# EAGLE board RT7258QW-break-panel (EAGLE 6.6.0)
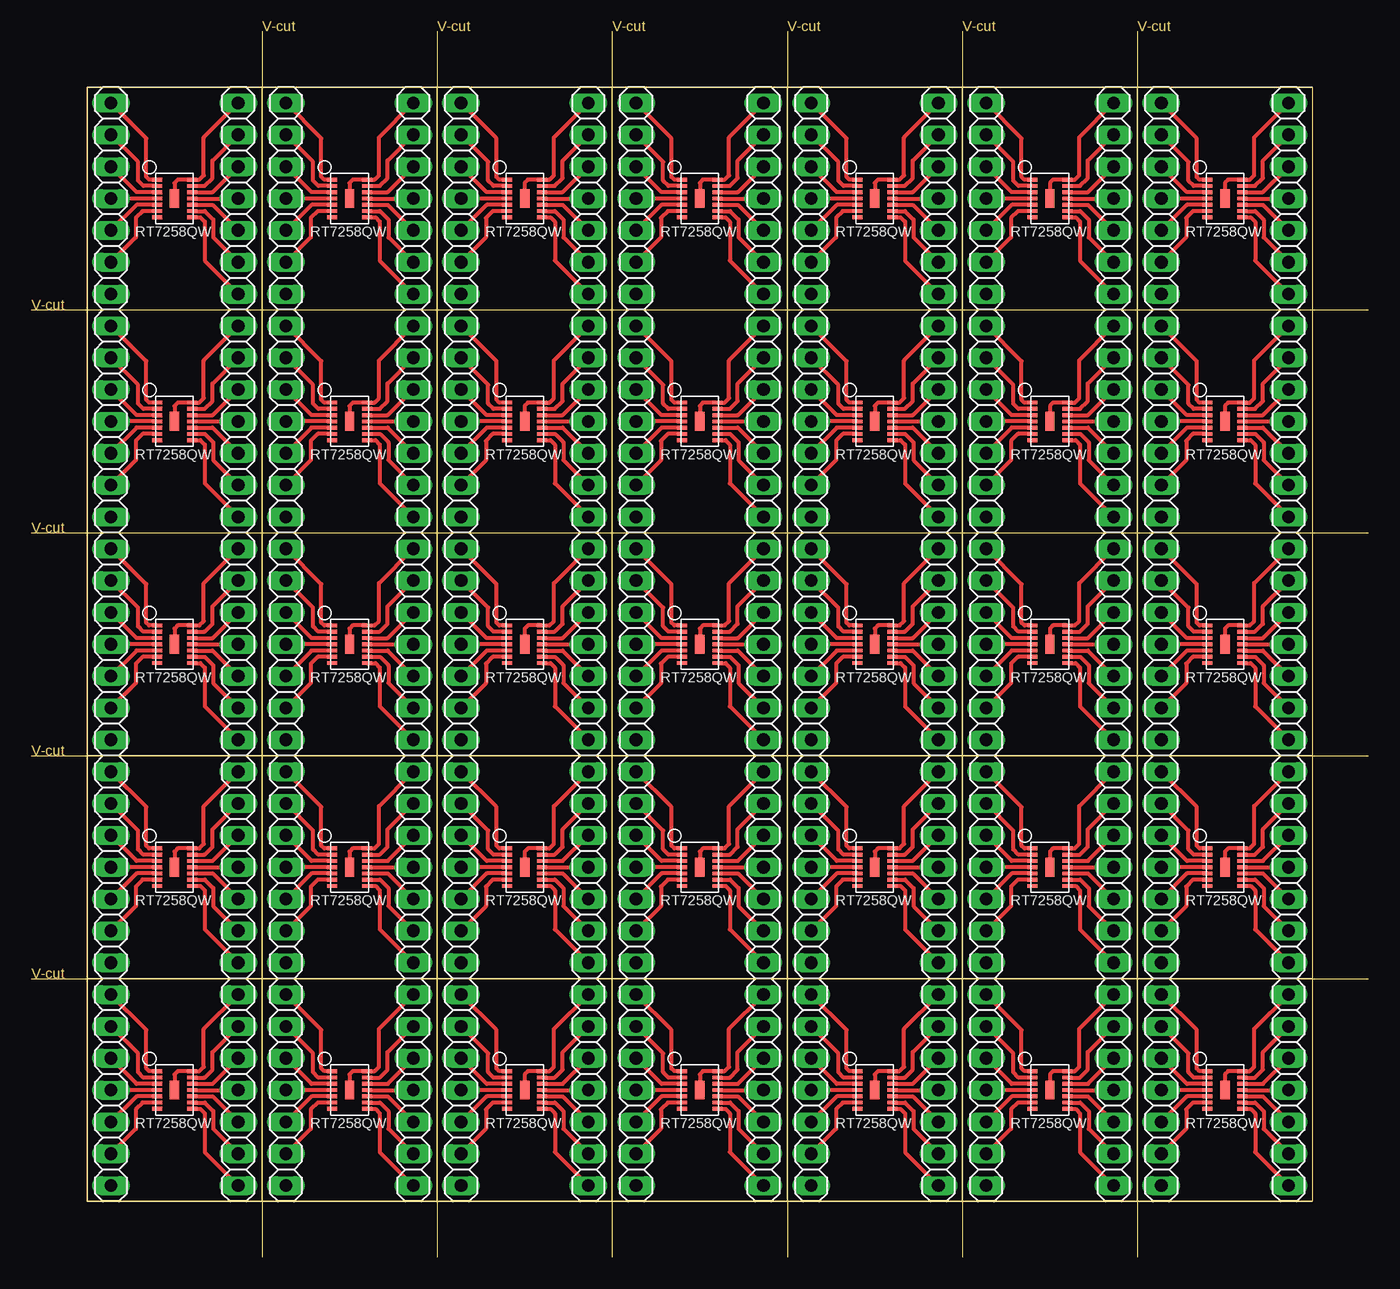
[diagram p0: board, top side]

Size 106.68 x 97.79 mm. Coordinates in mm from the lower left corner, seen from the top.
Outline: 46.36,4.45 46.36,93.34
Outline: 32.39,4.45 32.39,93.34
Outline: 18.42,4.45 18.42,93.34
Outline: 60.33,4.45 60.33,93.34
Outline: 74.3,4.45 74.3,93.34
Outline: 88.27,4.45 88.27,93.34
Outline: 0,75.56 106.68,75.56
Outline: 0,57.79 106.68,57.79
Outline: 0,40.01 106.68,40.01
Outline: 0,22.23 106.68,22.23
Outline: 18.42,97.79 18.42,0
Outline: 32.39,97.79 32.39,0
Outline: 46.36,97.79 46.36,0
Outline: 60.33,97.79 60.33,0
Outline: 74.3,97.79 74.3,0
Outline: 88.27,97.79 88.27,0
Outline: 4.45,93.34 102.24,93.34 102.24,4.45 4.45,4.45 4.45,93.34
Copper layers (1*16): Top 0.035mm / dielectric 1.5mm / Bottom 0.035mm
Design rules "SeeedStudio_2layer_DRU_no_angle_20140221": minimum track width 6mil, minimum drill 12mil, track to track 6mil, track to pad 6mil, pad to pad 6mil, via to via 6mil, smd to smd 0mil, copper to edge 10mil, drill to drill 10mil, minimum pad ring 10mil, minimum via ring 6mil, stop-mask expansion 2mil, vias tented up to drill 100mil, thermal gap 10mil

## Footprints (pad centres in the part's own frame; a part is rotated, then mirrored left to right if it is on the bottom)
1X07 = drill 1.016 long: 1 -7.62,0; 2 -5.08,0; 3 -2.54,0; 4 0,0; 5 2.54,0; 6 5.08,0; 7 7.62,0
RT7258GQW = smd 0.3 x 0.8: P$1 -1.5,-1.4; P$2 -1,-1.4; P$3 -0.5,-1.4; P$4 0,-1.4; P$5 0.5,-1.4; P$6 1,-1.4; P$7 1.5,-1.4; P$8 1.5,1.4; P$9 1,1.4; P$10 0.5,1.4; P$11 0,1.4; P$12 -0.5,1.4; P$13 -1,1.4; P$14 -1.5,1.4 | smd 1.5 x 0.75: P$15 0,0

## Placement (x,y rotation side)
JP1  [1X07]  48.26,48.9 270 top
JP2  [1X07]  58.42,48.9 270 top
JP3  [1X07]  34.29,48.9 270 top
JP4  [1X07]  44.45,48.9 270 top
JP5  [1X07]  20.32,48.9 270 top
JP6  [1X07]  30.48,48.9 270 top
JP7  [1X07]  6.35,48.9 270 top
JP8  [1X07]  16.51,48.9 270 top
JP9  [1X07]  62.23,48.9 270 top
JP10  [1X07]  72.39,48.9 270 top
JP11  [1X07]  76.2,48.9 270 top
JP12  [1X07]  86.36,48.9 270 top
JP13  [1X07]  90.17,48.9 270 top
JP14  [1X07]  100.33,48.9 270 top
JP15  [1X07]  48.26,66.68 270 top
JP16  [1X07]  58.42,66.68 270 top
JP17  [1X07]  34.29,66.68 270 top
JP18  [1X07]  44.45,66.68 270 top
JP19  [1X07]  20.32,66.68 270 top
JP20  [1X07]  30.48,66.68 270 top
JP21  [1X07]  6.35,66.68 270 top
JP22  [1X07]  16.51,66.68 270 top
JP23  [1X07]  62.23,66.68 270 top
JP24  [1X07]  72.39,66.68 270 top
JP25  [1X07]  76.2,66.68 270 top
JP26  [1X07]  86.36,66.68 270 top
JP27  [1X07]  90.17,66.68 270 top
JP28  [1X07]  100.33,66.68 270 top
JP29  [1X07]  48.26,84.46 270 top
JP30  [1X07]  58.42,84.46 270 top
JP31  [1X07]  34.29,84.46 270 top
JP32  [1X07]  44.45,84.46 270 top
JP33  [1X07]  20.32,84.46 270 top
JP34  [1X07]  30.48,84.46 270 top
JP35  [1X07]  6.35,84.46 270 top
JP36  [1X07]  16.51,84.46 270 top
JP37  [1X07]  62.23,84.46 270 top
JP38  [1X07]  72.39,84.46 270 top
JP39  [1X07]  76.2,84.46 270 top
JP40  [1X07]  86.36,84.46 270 top
JP41  [1X07]  90.17,84.46 270 top
JP42  [1X07]  100.33,84.46 270 top
JP43  [1X07]  48.26,31.12 270 top
JP44  [1X07]  58.42,31.12 270 top
JP45  [1X07]  34.29,31.12 270 top
JP46  [1X07]  44.45,31.12 270 top
JP47  [1X07]  20.32,31.12 270 top
JP48  [1X07]  30.48,31.12 270 top
JP49  [1X07]  6.35,31.12 270 top
JP50  [1X07]  16.51,31.12 270 top
JP51  [1X07]  62.23,31.12 270 top
JP52  [1X07]  72.39,31.12 270 top
JP53  [1X07]  76.2,31.12 270 top
JP54  [1X07]  86.36,31.12 270 top
JP55  [1X07]  90.17,31.12 270 top
JP56  [1X07]  100.33,31.12 270 top
JP57  [1X07]  48.26,13.34 270 top
JP58  [1X07]  58.42,13.34 270 top
JP59  [1X07]  34.29,13.34 270 top
JP60  [1X07]  44.45,13.34 270 top
JP61  [1X07]  20.32,13.34 270 top
JP62  [1X07]  30.48,13.34 270 top
JP63  [1X07]  6.35,13.34 270 top
JP64  [1X07]  16.51,13.34 270 top
JP65  [1X07]  62.23,13.34 270 top
JP66  [1X07]  72.39,13.34 270 top
JP67  [1X07]  76.2,13.34 270 top
JP68  [1X07]  86.36,13.34 270 top
JP69  [1X07]  90.17,13.34 270 top
JP70  [1X07]  100.33,13.34 270 top
U$1  RT7258QW  [RT7258GQW]  53.34,48.9 270 top
U$2  RT7258QW  [RT7258GQW]  39.37,48.9 270 top
U$3  RT7258QW  [RT7258GQW]  25.4,48.9 270 top
U$4  RT7258QW  [RT7258GQW]  11.43,48.9 270 top
U$5  RT7258QW  [RT7258GQW]  67.31,48.9 270 top
U$6  RT7258QW  [RT7258GQW]  81.28,48.9 270 top
U$7  RT7258QW  [RT7258GQW]  95.25,48.9 270 top
U$8  RT7258QW  [RT7258GQW]  53.34,66.68 270 top
U$9  RT7258QW  [RT7258GQW]  39.37,66.68 270 top
U$10  RT7258QW  [RT7258GQW]  25.4,66.68 270 top
U$11  RT7258QW  [RT7258GQW]  11.43,66.68 270 top
U$12  RT7258QW  [RT7258GQW]  67.31,66.68 270 top
U$13  RT7258QW  [RT7258GQW]  81.28,66.68 270 top
U$14  RT7258QW  [RT7258GQW]  95.25,66.68 270 top
U$15  RT7258QW  [RT7258GQW]  53.34,84.46 270 top
U$16  RT7258QW  [RT7258GQW]  39.37,84.46 270 top
U$17  RT7258QW  [RT7258GQW]  25.4,84.46 270 top
U$18  RT7258QW  [RT7258GQW]  11.43,84.46 270 top
U$19  RT7258QW  [RT7258GQW]  67.31,84.46 270 top
U$20  RT7258QW  [RT7258GQW]  81.28,84.46 270 top
U$21  RT7258QW  [RT7258GQW]  95.25,84.46 270 top
U$22  RT7258QW  [RT7258GQW]  53.34,31.12 270 top
U$23  RT7258QW  [RT7258GQW]  39.37,31.12 270 top
U$24  RT7258QW  [RT7258GQW]  25.4,31.12 270 top
U$25  RT7258QW  [RT7258GQW]  11.43,31.12 270 top
U$26  RT7258QW  [RT7258GQW]  67.31,31.12 270 top
U$27  RT7258QW  [RT7258GQW]  81.28,31.12 270 top
U$28  RT7258QW  [RT7258GQW]  95.25,31.12 270 top
U$29  RT7258QW  [RT7258GQW]  53.34,13.34 270 top
U$30  RT7258QW  [RT7258GQW]  39.37,13.34 270 top
U$31  RT7258QW  [RT7258GQW]  25.4,13.34 270 top
U$32  RT7258QW  [RT7258GQW]  11.43,13.34 270 top
U$33  RT7258QW  [RT7258GQW]  67.31,13.34 270 top
U$34  RT7258QW  [RT7258GQW]  81.28,13.34 270 top
U$35  RT7258QW  [RT7258GQW]  95.25,13.34 270 top

## Library data of the parts
JP1-JP70 = pinhead
U$1-U$35 = PCR-IC

## Nets
1: JP1.1 U$1.P$1
2: JP1.2 U$1.P$2
3: JP1.3 U$1.P$3
4: JP1.4 U$1.P$4
5: JP1.5 U$1.P$5
6: JP1.6 U$1.P$6
7: JP1.7
8: JP2.7 U$1.P$8
9: JP2.6 U$1.P$9
10: JP2.5 U$1.P$10
11: JP2.4 U$1.P$11
12: JP2.3 U$1.P$12
13: JP2.2 U$1.P$13
14: JP2.1 U$1.P$14 U$1.P$15
15: JP3.7
16: JP3.4 U$2.P$4
17: JP3.5 U$2.P$5
18: JP3.6 U$2.P$6
19: JP4.3 U$2.P$12
20: JP3.2 U$2.P$2
21: JP3.3 U$2.P$3
22: JP4.1 U$2.P$14 U$2.P$15
23: JP3.1 U$2.P$1
24: JP4.2 U$2.P$13
25: JP4.5 U$2.P$10
26: JP4.6 U$2.P$9
27: JP4.7 U$2.P$8
28: JP4.4 U$2.P$11
29: JP5.7
30: JP5.4 U$3.P$4
31: JP5.5 U$3.P$5
32: JP5.6 U$3.P$6
33: JP6.3 U$3.P$12
34: JP5.2 U$3.P$2
35: JP5.3 U$3.P$3
36: JP6.1 U$3.P$14 U$3.P$15
37: JP5.1 U$3.P$1
38: JP6.2 U$3.P$13
39: JP6.5 U$3.P$10
40: JP6.6 U$3.P$9
41: JP6.7 U$3.P$8
42: JP6.4 U$3.P$11
43: JP7.7
44: JP7.4 U$4.P$4
45: JP7.5 U$4.P$5
46: JP7.6 U$4.P$6
47: JP8.3 U$4.P$12
48: JP7.2 U$4.P$2
49: JP7.3 U$4.P$3
50: JP8.1 U$4.P$14 U$4.P$15
51: JP7.1 U$4.P$1
52: JP8.2 U$4.P$13
53: JP8.5 U$4.P$10
54: JP8.6 U$4.P$9
55: JP8.7 U$4.P$8
56: JP8.4 U$4.P$11
57: JP9.7
58: JP9.4 U$5.P$4
59: JP9.5 U$5.P$5
60: JP9.6 U$5.P$6
61: JP10.3 U$5.P$12
62: JP9.2 U$5.P$2
63: JP9.3 U$5.P$3
64: JP10.1 U$5.P$14 U$5.P$15
65: JP9.1 U$5.P$1
66: JP10.2 U$5.P$13
67: JP10.5 U$5.P$10
68: JP10.6 U$5.P$9
69: JP10.7 U$5.P$8
70: JP10.4 U$5.P$11
71: JP11.7
72: JP11.4 U$6.P$4
73: JP11.5 U$6.P$5
74: JP11.6 U$6.P$6
75: JP12.3 U$6.P$12
76: JP11.2 U$6.P$2
77: JP11.3 U$6.P$3
78: JP12.1 U$6.P$14 U$6.P$15
79: JP11.1 U$6.P$1
80: JP12.2 U$6.P$13
81: JP12.5 U$6.P$10
82: JP12.6 U$6.P$9
83: JP12.7 U$6.P$8
84: JP12.4 U$6.P$11
85: JP13.7
86: JP13.4 U$7.P$4
87: JP13.5 U$7.P$5
88: JP13.6 U$7.P$6
89: JP14.3 U$7.P$12
90: JP13.2 U$7.P$2
91: JP13.3 U$7.P$3
92: JP14.1 U$7.P$14 U$7.P$15
93: JP13.1 U$7.P$1
94: JP14.2 U$7.P$13
95: JP14.5 U$7.P$10
96: JP14.6 U$7.P$9
97: JP14.7 U$7.P$8
98: JP14.4 U$7.P$11
99: JP15.7
100: JP15.4 U$8.P$4
101: JP15.5 U$8.P$5
102: JP15.6 U$8.P$6
103: JP16.3 U$8.P$12
104: JP15.2 U$8.P$2
105: JP15.3 U$8.P$3
106: JP16.1 U$8.P$14 U$8.P$15
107: JP15.1 U$8.P$1
108: JP16.2 U$8.P$13
109: JP16.5 U$8.P$10
110: JP16.6 U$8.P$9
111: JP16.7 U$8.P$8
112: JP16.4 U$8.P$11
113: JP17.7
114: JP17.4 U$9.P$4
115: JP17.5 U$9.P$5
116: JP17.6 U$9.P$6
117: JP18.3 U$9.P$12
118: JP17.2 U$9.P$2
119: JP17.3 U$9.P$3
120: JP18.1 U$9.P$14 U$9.P$15
121: JP17.1 U$9.P$1
122: JP18.2 U$9.P$13
123: JP18.5 U$9.P$10
124: JP18.6 U$9.P$9
125: JP18.7 U$9.P$8
126: JP18.4 U$9.P$11
127: JP19.7
128: JP19.4 U$10.P$4
129: JP19.5 U$10.P$5
130: JP19.6 U$10.P$6
131: JP20.3 U$10.P$12
132: JP19.2 U$10.P$2
133: JP19.3 U$10.P$3
134: JP20.1 U$10.P$14 U$10.P$15
135: JP19.1 U$10.P$1
136: JP20.2 U$10.P$13
137: JP20.5 U$10.P$10
138: JP20.6 U$10.P$9
139: JP20.7 U$10.P$8
140: JP20.4 U$10.P$11
141: JP21.7
142: JP21.4 U$11.P$4
143: JP21.5 U$11.P$5
144: JP21.6 U$11.P$6
145: JP22.3 U$11.P$12
146: JP21.2 U$11.P$2
147: JP21.3 U$11.P$3
148: JP22.1 U$11.P$14 U$11.P$15
149: JP21.1 U$11.P$1
150: JP22.2 U$11.P$13
151: JP22.5 U$11.P$10
152: JP22.6 U$11.P$9
153: JP22.7 U$11.P$8
154: JP22.4 U$11.P$11
155: JP23.7
156: JP23.4 U$12.P$4
157: JP23.5 U$12.P$5
158: JP23.6 U$12.P$6
159: JP24.3 U$12.P$12
160: JP23.2 U$12.P$2
161: JP23.3 U$12.P$3
162: JP24.1 U$12.P$14 U$12.P$15
163: JP23.1 U$12.P$1
164: JP24.2 U$12.P$13
165: JP24.5 U$12.P$10
166: JP24.6 U$12.P$9
167: JP24.7 U$12.P$8
168: JP24.4 U$12.P$11
169: JP25.7
170: JP25.4 U$13.P$4
171: JP25.5 U$13.P$5
172: JP25.6 U$13.P$6
173: JP26.3 U$13.P$12
174: JP25.2 U$13.P$2
175: JP25.3 U$13.P$3
176: JP26.1 U$13.P$14 U$13.P$15
177: JP25.1 U$13.P$1
178: JP26.2 U$13.P$13
179: JP26.5 U$13.P$10
180: JP26.6 U$13.P$9
181: JP26.7 U$13.P$8
182: JP26.4 U$13.P$11
183: JP27.7
184: JP27.4 U$14.P$4
185: JP27.5 U$14.P$5
186: JP27.6 U$14.P$6
187: JP28.3 U$14.P$12
188: JP27.2 U$14.P$2
189: JP27.3 U$14.P$3
190: JP28.1 U$14.P$14 U$14.P$15
191: JP27.1 U$14.P$1
192: JP28.2 U$14.P$13
193: JP28.5 U$14.P$10
194: JP28.6 U$14.P$9
195: JP28.7 U$14.P$8
196: JP28.4 U$14.P$11
197: JP29.7
198: JP29.4 U$15.P$4
199: JP29.5 U$15.P$5
200: JP29.6 U$15.P$6
201: JP30.3 U$15.P$12
202: JP29.2 U$15.P$2
203: JP29.3 U$15.P$3
204: JP30.1 U$15.P$14 U$15.P$15
205: JP29.1 U$15.P$1
206: JP30.2 U$15.P$13
207: JP30.5 U$15.P$10
208: JP30.6 U$15.P$9
209: JP30.7 U$15.P$8
210: JP30.4 U$15.P$11
211: JP31.7
212: JP31.4 U$16.P$4
213: JP31.5 U$16.P$5
214: JP31.6 U$16.P$6
215: JP32.3 U$16.P$12
216: JP31.2 U$16.P$2
217: JP31.3 U$16.P$3
218: JP32.1 U$16.P$14 U$16.P$15
219: JP31.1 U$16.P$1
220: JP32.2 U$16.P$13
221: JP32.5 U$16.P$10
222: JP32.6 U$16.P$9
223: JP32.7 U$16.P$8
224: JP32.4 U$16.P$11
225: JP33.7
226: JP33.4 U$17.P$4
227: JP33.5 U$17.P$5
228: JP33.6 U$17.P$6
229: JP34.3 U$17.P$12
230: JP33.2 U$17.P$2
231: JP33.3 U$17.P$3
232: JP34.1 U$17.P$14 U$17.P$15
233: JP33.1 U$17.P$1
234: JP34.2 U$17.P$13
235: JP34.5 U$17.P$10
236: JP34.6 U$17.P$9
237: JP34.7 U$17.P$8
238: JP34.4 U$17.P$11
239: JP35.7
240: JP35.4 U$18.P$4
241: JP35.5 U$18.P$5
242: JP35.6 U$18.P$6
243: JP36.3 U$18.P$12
244: JP35.2 U$18.P$2
245: JP35.3 U$18.P$3
246: JP36.1 U$18.P$14 U$18.P$15
247: JP35.1 U$18.P$1
248: JP36.2 U$18.P$13
249: JP36.5 U$18.P$10
250: JP36.6 U$18.P$9
251: JP36.7 U$18.P$8
252: JP36.4 U$18.P$11
253: JP37.7
254: JP37.4 U$19.P$4
255: JP37.5 U$19.P$5
256: JP37.6 U$19.P$6
257: JP38.3 U$19.P$12
258: JP37.2 U$19.P$2
259: JP37.3 U$19.P$3
260: JP38.1 U$19.P$14 U$19.P$15
261: JP37.1 U$19.P$1
262: JP38.2 U$19.P$13
263: JP38.5 U$19.P$10
264: JP38.6 U$19.P$9
265: JP38.7 U$19.P$8
266: JP38.4 U$19.P$11
267: JP39.7
268: JP39.4 U$20.P$4
269: JP39.5 U$20.P$5
270: JP39.6 U$20.P$6
271: JP40.3 U$20.P$12
272: JP39.2 U$20.P$2
273: JP39.3 U$20.P$3
274: JP40.1 U$20.P$14 U$20.P$15
275: JP39.1 U$20.P$1
276: JP40.2 U$20.P$13
277: JP40.5 U$20.P$10
278: JP40.6 U$20.P$9
279: JP40.7 U$20.P$8
280: JP40.4 U$20.P$11
281: JP41.7
282: JP41.4 U$21.P$4
283: JP41.5 U$21.P$5
284: JP41.6 U$21.P$6
285: JP42.3 U$21.P$12
286: JP41.2 U$21.P$2
287: JP41.3 U$21.P$3
288: JP42.1 U$21.P$14 U$21.P$15
289: JP41.1 U$21.P$1
290: JP42.2 U$21.P$13
291: JP42.5 U$21.P$10
292: JP42.6 U$21.P$9
293: JP42.7 U$21.P$8
294: JP42.4 U$21.P$11
295: JP43.7
296: JP43.4 U$22.P$4
297: JP43.5 U$22.P$5
298: JP43.6 U$22.P$6
299: JP44.3 U$22.P$12
300: JP43.2 U$22.P$2
301: JP43.3 U$22.P$3
302: JP44.1 U$22.P$14 U$22.P$15
303: JP43.1 U$22.P$1
304: JP44.2 U$22.P$13
305: JP44.5 U$22.P$10
306: JP44.6 U$22.P$9
307: JP44.7 U$22.P$8
308: JP44.4 U$22.P$11
309: JP45.7
310: JP45.4 U$23.P$4
311: JP45.5 U$23.P$5
312: JP45.6 U$23.P$6
313: JP46.3 U$23.P$12
314: JP45.2 U$23.P$2
315: JP45.3 U$23.P$3
316: JP46.1 U$23.P$14 U$23.P$15
317: JP45.1 U$23.P$1
318: JP46.2 U$23.P$13
319: JP46.5 U$23.P$10
320: JP46.6 U$23.P$9
321: JP46.7 U$23.P$8
322: JP46.4 U$23.P$11
323: JP47.7
324: JP47.4 U$24.P$4
325: JP47.5 U$24.P$5
326: JP47.6 U$24.P$6
327: JP48.3 U$24.P$12
328: JP47.2 U$24.P$2
329: JP47.3 U$24.P$3
330: JP48.1 U$24.P$14 U$24.P$15
331: JP47.1 U$24.P$1
332: JP48.2 U$24.P$13
333: JP48.5 U$24.P$10
334: JP48.6 U$24.P$9
335: JP48.7 U$24.P$8
336: JP48.4 U$24.P$11
337: JP49.7
338: JP49.4 U$25.P$4
339: JP49.5 U$25.P$5
340: JP49.6 U$25.P$6
341: JP50.3 U$25.P$12
342: JP49.2 U$25.P$2
343: JP49.3 U$25.P$3
344: JP50.1 U$25.P$14 U$25.P$15
345: JP49.1 U$25.P$1
346: JP50.2 U$25.P$13
347: JP50.5 U$25.P$10
348: JP50.6 U$25.P$9
349: JP50.7 U$25.P$8
350: JP50.4 U$25.P$11
351: JP51.7
352: JP51.4 U$26.P$4
353: JP51.5 U$26.P$5
354: JP51.6 U$26.P$6
355: JP52.3 U$26.P$12
356: JP51.2 U$26.P$2
357: JP51.3 U$26.P$3
358: JP52.1 U$26.P$14 U$26.P$15
359: JP51.1 U$26.P$1
360: JP52.2 U$26.P$13
361: JP52.5 U$26.P$10
362: JP52.6 U$26.P$9
363: JP52.7 U$26.P$8
364: JP52.4 U$26.P$11
365: JP53.7
366: JP53.4 U$27.P$4
367: JP53.5 U$27.P$5
368: JP53.6 U$27.P$6
369: JP54.3 U$27.P$12
370: JP53.2 U$27.P$2
371: JP53.3 U$27.P$3
372: JP54.1 U$27.P$14 U$27.P$15
373: JP53.1 U$27.P$1
374: JP54.2 U$27.P$13
375: JP54.5 U$27.P$10
376: JP54.6 U$27.P$9
377: JP54.7 U$27.P$8
378: JP54.4 U$27.P$11
379: JP55.7
380: JP55.4 U$28.P$4
381: JP55.5 U$28.P$5
382: JP55.6 U$28.P$6
383: JP56.3 U$28.P$12
384: JP55.2 U$28.P$2
385: JP55.3 U$28.P$3
386: JP56.1 U$28.P$14 U$28.P$15
387: JP55.1 U$28.P$1
388: JP56.2 U$28.P$13
389: JP56.5 U$28.P$10
390: JP56.6 U$28.P$9
391: JP56.7 U$28.P$8
392: JP56.4 U$28.P$11
393: JP57.7
394: JP57.4 U$29.P$4
395: JP57.5 U$29.P$5
396: JP57.6 U$29.P$6
397: JP58.3 U$29.P$12
398: JP57.2 U$29.P$2
399: JP57.3 U$29.P$3
400: JP58.1 U$29.P$14 U$29.P$15
401: JP57.1 U$29.P$1
402: JP58.2 U$29.P$13
403: JP58.5 U$29.P$10
404: JP58.6 U$29.P$9
405: JP58.7 U$29.P$8
406: JP58.4 U$29.P$11
407: JP59.7
408: JP59.4 U$30.P$4
409: JP59.5 U$30.P$5
410: JP59.6 U$30.P$6
411: JP60.3 U$30.P$12
412: JP59.2 U$30.P$2
413: JP59.3 U$30.P$3
414: JP60.1 U$30.P$14 U$30.P$15
415: JP59.1 U$30.P$1
416: JP60.2 U$30.P$13
417: JP60.5 U$30.P$10
418: JP60.6 U$30.P$9
419: JP60.7 U$30.P$8
420: JP60.4 U$30.P$11
421: JP61.7
422: JP61.4 U$31.P$4
423: JP61.5 U$31.P$5
424: JP61.6 U$31.P$6
425: JP62.3 U$31.P$12
426: JP61.2 U$31.P$2
427: JP61.3 U$31.P$3
428: JP62.1 U$31.P$14 U$31.P$15
429: JP61.1 U$31.P$1
430: JP62.2 U$31.P$13
431: JP62.5 U$31.P$10
432: JP62.6 U$31.P$9
433: JP62.7 U$31.P$8
434: JP62.4 U$31.P$11
435: JP63.7
436: JP63.4 U$32.P$4
437: JP63.5 U$32.P$5
438: JP63.6 U$32.P$6
439: JP64.3 U$32.P$12
440: JP63.2 U$32.P$2
441: JP63.3 U$32.P$3
442: JP64.1 U$32.P$14 U$32.P$15
443: JP63.1 U$32.P$1
444: JP64.2 U$32.P$13
445: JP64.5 U$32.P$10
446: JP64.6 U$32.P$9
447: JP64.7 U$32.P$8
448: JP64.4 U$32.P$11
449: JP65.7
450: JP65.4 U$33.P$4
451: JP65.5 U$33.P$5
452: JP65.6 U$33.P$6
453: JP66.3 U$33.P$12
454: JP65.2 U$33.P$2
455: JP65.3 U$33.P$3
456: JP66.1 U$33.P$14 U$33.P$15
457: JP65.1 U$33.P$1
458: JP66.2 U$33.P$13
459: JP66.5 U$33.P$10
460: JP66.6 U$33.P$9
461: JP66.7 U$33.P$8
462: JP66.4 U$33.P$11
463: JP67.7
464: JP67.4 U$34.P$4
465: JP67.5 U$34.P$5
466: JP67.6 U$34.P$6
467: JP68.3 U$34.P$12
468: JP67.2 U$34.P$2
469: JP67.3 U$34.P$3
470: JP68.1 U$34.P$14 U$34.P$15
471: JP67.1 U$34.P$1
472: JP68.2 U$34.P$13
473: JP68.5 U$34.P$10
474: JP68.6 U$34.P$9
475: JP68.7 U$34.P$8
476: JP68.4 U$34.P$11
477: JP69.7
478: JP69.4 U$35.P$4
479: JP69.5 U$35.P$5
480: JP69.6 U$35.P$6
481: JP70.3 U$35.P$12
482: JP69.2 U$35.P$2
483: JP69.3 U$35.P$3
484: JP70.1 U$35.P$14 U$35.P$15
485: JP69.1 U$35.P$1
486: JP70.2 U$35.P$13
487: JP70.5 U$35.P$10
488: JP70.6 U$35.P$9
489: JP70.7 U$35.P$8
490: JP70.4 U$35.P$11

## Tracks (layer width: path | path; a pad name or v marks a point on that pad's centre or on a via)
1
  Top 0.305: U$1.P$1 51.31,50.4 51.08,50.62 51.08,53.7 JP1.1
2
  Top 0.305: U$1.P$2 50.84,49.9 50.42,50.32 50.42,51.82 JP1.2
3
  Top 0.305: U$1.P$3 50.3,49.4 JP1.3
4
  Top 0.305: U$1.P$4 JP1.4
5
  Top 0.305: U$1.P$5 50.3,48.4 JP1.5
6
  Top 0.305: U$1.P$6 50.79,47.9 50.24,47.35 50.24,45.8 JP1.6
8
  Top 0.305: U$1.P$8 55.4,47.4 55.75,47.04 55.75,43.94 JP2.7
9
  Top 0.305: U$1.P$9 55.76,47.9 56.44,47.22 56.44,45.8 JP2.6
10
  Top 0.305: U$1.P$10 56.38,48.4 JP2.5
11
  Top 0.305: U$1.P$11 JP2.4
12
  Top 0.305: U$1.P$12 56.38,49.4 JP2.3
13
  Top 0.305: U$1.P$13 55.74,49.9 56.36,50.52 56.36,51.92 JP2.2
14
  Top 0.305: JP2.1 55.68,53.77 55.68,50.75 55.32,50.4 U$1.P$14 53.6,50.4 53.34,50.14 U$1.P$15
16
  Top 0.305: U$2.P$4 JP3.4
17
  Top 0.305: U$2.P$5 36.33,48.4 JP3.5
18
  Top 0.305: U$2.P$6 36.82,47.9 36.27,47.35 36.27,45.8 JP3.6
19
  Top 0.305: U$2.P$12 42.41,49.4 JP4.3
20
  Top 0.305: U$2.P$2 36.87,49.9 36.45,50.32 36.45,51.82 JP3.2
21
  Top 0.305: U$2.P$3 36.33,49.4 JP3.3
22
  Top 0.305: JP4.1 41.71,53.77 41.71,50.75 41.35,50.4 U$2.P$14 39.62,50.4 39.37,50.14 U$2.P$15
23
  Top 0.305: U$2.P$1 37.34,50.4 37.11,50.62 37.11,53.7 JP3.1
24
  Top 0.305: U$2.P$13 41.77,49.9 42.39,50.52 42.39,51.92 JP4.2
25
  Top 0.305: U$2.P$10 42.41,48.4 JP4.5
26
  Top 0.305: U$2.P$9 41.79,47.9 42.47,47.22 42.47,45.8 JP4.6
27
  Top 0.305: U$2.P$8 41.43,47.4 41.78,47.04 41.78,43.94 JP4.7
28
  Top 0.305: U$2.P$11 JP4.4
30
  Top 0.305: U$3.P$4 JP5.4
31
  Top 0.305: U$3.P$5 22.36,48.4 JP5.5
32
  Top 0.305: U$3.P$6 22.85,47.9 22.3,47.35 22.3,45.8 JP5.6
33
  Top 0.305: U$3.P$12 28.44,49.4 JP6.3
34
  Top 0.305: U$3.P$2 22.9,49.9 22.48,50.32 22.48,51.82 JP5.2
35
  Top 0.305: U$3.P$3 22.36,49.4 JP5.3
36
  Top 0.305: JP6.1 27.74,53.77 27.74,50.75 27.38,50.4 U$3.P$14 25.66,50.4 25.4,50.14 U$3.P$15
37
  Top 0.305: U$3.P$1 23.37,50.4 23.14,50.62 23.14,53.7 JP5.1
38
  Top 0.305: U$3.P$13 27.8,49.9 28.42,50.52 28.42,51.92 JP6.2
39
  Top 0.305: U$3.P$10 28.44,48.4 JP6.5
40
  Top 0.305: U$3.P$9 27.82,47.9 28.5,47.22 28.5,45.8 JP6.6
41
  Top 0.305: U$3.P$8 27.46,47.4 27.81,47.04 27.81,43.94 JP6.7
42
  Top 0.305: U$3.P$11 JP6.4
44
  Top 0.305: U$4.P$4 JP7.4
45
  Top 0.305: U$4.P$5 8.39,48.4 JP7.5
46
  Top 0.305: U$4.P$6 8.88,47.9 8.33,47.35 8.33,45.8 JP7.6
47
  Top 0.305: U$4.P$12 14.47,49.4 JP8.3
48
  Top 0.305: U$4.P$2 8.93,49.9 8.51,50.32 8.51,51.82 JP7.2
49
  Top 0.305: U$4.P$3 8.39,49.4 JP7.3
50
  Top 0.305: JP8.1 13.77,53.77 13.77,50.75 13.41,50.4 U$4.P$14 11.69,50.4 11.43,50.14 U$4.P$15
51
  Top 0.305: U$4.P$1 9.4,50.4 9.17,50.62 9.17,53.7 JP7.1
52
  Top 0.305: U$4.P$13 13.83,49.9 14.45,50.52 14.45,51.92 JP8.2
53
  Top 0.305: U$4.P$10 14.47,48.4 JP8.5
54
  Top 0.305: U$4.P$9 13.85,47.9 14.53,47.22 14.53,45.8 JP8.6
55
  Top 0.305: U$4.P$8 13.49,47.4 13.84,47.04 13.84,43.94 JP8.7
56
  Top 0.305: U$4.P$11 JP8.4
58
  Top 0.305: U$5.P$4 JP9.4
59
  Top 0.305: U$5.P$5 64.27,48.4 JP9.5
60
  Top 0.305: U$5.P$6 64.76,47.9 64.21,47.35 64.21,45.8 JP9.6
61
  Top 0.305: U$5.P$12 70.35,49.4 JP10.3
62
  Top 0.305: U$5.P$2 64.81,49.9 64.39,50.32 64.39,51.82 JP9.2
63
  Top 0.305: U$5.P$3 64.27,49.4 JP9.3
64
  Top 0.305: JP10.1 69.65,53.77 69.65,50.75 69.29,50.4 U$5.P$14 67.56,50.4 67.31,50.14 U$5.P$15
65
  Top 0.305: U$5.P$1 65.28,50.4 65.05,50.62 65.05,53.7 JP9.1
66
  Top 0.305: U$5.P$13 69.71,49.9 70.33,50.52 70.33,51.92 JP10.2
67
  Top 0.305: U$5.P$10 70.35,48.4 JP10.5
68
  Top 0.305: U$5.P$9 69.73,47.9 70.41,47.22 70.41,45.8 JP10.6
69
  Top 0.305: U$5.P$8 69.37,47.4 69.72,47.04 69.72,43.94 JP10.7
70
  Top 0.305: U$5.P$11 JP10.4
72
  Top 0.305: U$6.P$4 JP11.4
73
  Top 0.305: U$6.P$5 78.24,48.4 JP11.5
74
  Top 0.305: U$6.P$6 78.73,47.9 78.18,47.35 78.18,45.8 JP11.6
75
  Top 0.305: U$6.P$12 84.32,49.4 JP12.3
76
  Top 0.305: U$6.P$2 78.78,49.9 78.36,50.32 78.36,51.82 JP11.2
77
  Top 0.305: U$6.P$3 78.24,49.4 JP11.3
78
  Top 0.305: JP12.1 83.62,53.77 83.62,50.75 83.26,50.4 U$6.P$14 81.53,50.4 81.28,50.14 U$6.P$15
79
  Top 0.305: U$6.P$1 79.25,50.4 79.02,50.62 79.02,53.7 JP11.1
80
  Top 0.305: U$6.P$13 83.68,49.9 84.3,50.52 84.3,51.92 JP12.2
81
  Top 0.305: U$6.P$10 84.32,48.4 JP12.5
82
  Top 0.305: U$6.P$9 83.7,47.9 84.38,47.22 84.38,45.8 JP12.6
83
  Top 0.305: U$6.P$8 83.34,47.4 83.69,47.04 83.69,43.94 JP12.7
84
  Top 0.305: U$6.P$11 JP12.4
86
  Top 0.305: U$7.P$4 JP13.4
87
  Top 0.305: U$7.P$5 92.21,48.4 JP13.5
88
  Top 0.305: U$7.P$6 92.7,47.9 92.15,47.35 92.15,45.8 JP13.6
89
  Top 0.305: U$7.P$12 98.29,49.4 JP14.3
90
  Top 0.305: U$7.P$2 92.75,49.9 92.33,50.32 92.33,51.82 JP13.2
91
  Top 0.305: U$7.P$3 92.21,49.4 JP13.3
92
  Top 0.305: JP14.1 97.59,53.77 97.59,50.75 97.23,50.4 U$7.P$14 95.5,50.4 95.25,50.14 U$7.P$15
93
  Top 0.305: U$7.P$1 93.22,50.4 92.99,50.62 92.99,53.7 JP13.1
94
  Top 0.305: U$7.P$13 97.65,49.9 98.27,50.52 98.27,51.92 JP14.2
95
  Top 0.305: U$7.P$10 98.29,48.4 JP14.5
96
  Top 0.305: U$7.P$9 97.67,47.9 98.35,47.22 98.35,45.8 JP14.6
97
  Top 0.305: U$7.P$8 97.31,47.4 97.66,47.04 97.66,43.94 JP14.7
98
  Top 0.305: U$7.P$11 JP14.4
100
  Top 0.305: U$8.P$4 JP15.4
101
  Top 0.305: U$8.P$5 50.3,66.18 JP15.5
102
  Top 0.305: U$8.P$6 50.79,65.68 50.24,65.13 50.24,63.58 JP15.6
103
  Top 0.305: U$8.P$12 56.38,67.18 JP16.3
104
  Top 0.305: U$8.P$2 50.84,67.68 50.42,68.1 50.42,69.6 JP15.2
105
  Top 0.305: U$8.P$3 50.3,67.18 JP15.3
106
  Top 0.305: JP16.1 55.68,71.55 55.68,68.53 55.32,68.18 U$8.P$14 53.6,68.18 53.34,67.92 U$8.P$15
107
  Top 0.305: U$8.P$1 51.31,68.18 51.08,68.4 51.08,71.48 JP15.1
108
  Top 0.305: U$8.P$13 55.74,67.68 56.36,68.3 56.36,69.7 JP16.2
109
  Top 0.305: U$8.P$10 56.38,66.18 JP16.5
110
  Top 0.305: U$8.P$9 55.76,65.68 56.44,65 56.44,63.58 JP16.6
111
  Top 0.305: U$8.P$8 55.4,65.18 55.75,64.82 55.75,61.72 JP16.7
112
  Top 0.305: U$8.P$11 JP16.4
114
  Top 0.305: U$9.P$4 JP17.4
115
  Top 0.305: U$9.P$5 36.33,66.18 JP17.5
116
  Top 0.305: U$9.P$6 36.82,65.68 36.27,65.13 36.27,63.58 JP17.6
117
  Top 0.305: U$9.P$12 42.41,67.18 JP18.3
118
  Top 0.305: U$9.P$2 36.87,67.68 36.45,68.1 36.45,69.6 JP17.2
119
  Top 0.305: U$9.P$3 36.33,67.18 JP17.3
120
  Top 0.305: JP18.1 41.71,71.55 41.71,68.53 41.35,68.18 U$9.P$14 39.62,68.18 39.37,67.92 U$9.P$15
121
  Top 0.305: U$9.P$1 37.34,68.18 37.11,68.4 37.11,71.48 JP17.1
122
  Top 0.305: U$9.P$13 41.77,67.68 42.39,68.3 42.39,69.7 JP18.2
123
  Top 0.305: U$9.P$10 42.41,66.18 JP18.5
124
  Top 0.305: U$9.P$9 41.79,65.68 42.47,65 42.47,63.58 JP18.6
125
  Top 0.305: U$9.P$8 41.43,65.18 41.78,64.82 41.78,61.72 JP18.7
126
  Top 0.305: U$9.P$11 JP18.4
128
  Top 0.305: U$10.P$4 JP19.4
129
  Top 0.305: U$10.P$5 22.36,66.18 JP19.5
130
  Top 0.305: U$10.P$6 22.85,65.68 22.3,65.13 22.3,63.58 JP19.6
131
  Top 0.305: U$10.P$12 28.44,67.18 JP20.3
132
  Top 0.305: U$10.P$2 22.9,67.68 22.48,68.1 22.48,69.6 JP19.2
133
  Top 0.305: U$10.P$3 22.36,67.18 JP19.3
134
  Top 0.305: JP20.1 27.74,71.55 27.74,68.53 27.38,68.18 U$10.P$14 25.66,68.18 25.4,67.92 U$10.P$15
135
  Top 0.305: U$10.P$1 23.37,68.18 23.14,68.4 23.14,71.48 JP19.1
136
  Top 0.305: U$10.P$13 27.8,67.68 28.42,68.3 28.42,69.7 JP20.2
137
  Top 0.305: U$10.P$10 28.44,66.18 JP20.5
138
  Top 0.305: U$10.P$9 27.82,65.68 28.5,65 28.5,63.58 JP20.6
139
  Top 0.305: U$10.P$8 27.46,65.18 27.81,64.82 27.81,61.72 JP20.7
140
  Top 0.305: U$10.P$11 JP20.4
142
  Top 0.305: U$11.P$4 JP21.4
143
  Top 0.305: U$11.P$5 8.39,66.18 JP21.5
144
  Top 0.305: U$11.P$6 8.88,65.68 8.33,65.13 8.33,63.58 JP21.6
145
  Top 0.305: U$11.P$12 14.47,67.18 JP22.3
146
  Top 0.305: U$11.P$2 8.93,67.68 8.51,68.1 8.51,69.6 JP21.2
147
  Top 0.305: U$11.P$3 8.39,67.18 JP21.3
148
  Top 0.305: JP22.1 13.77,71.55 13.77,68.53 13.41,68.18 U$11.P$14 11.69,68.18 11.43,67.92 U$11.P$15
149
  Top 0.305: U$11.P$1 9.4,68.18 9.17,68.4 9.17,71.48 JP21.1
150
  Top 0.305: U$11.P$13 13.83,67.68 14.45,68.3 14.45,69.7 JP22.2
151
  Top 0.305: U$11.P$10 14.47,66.18 JP22.5
152
  Top 0.305: U$11.P$9 13.85,65.68 14.53,65 14.53,63.58 JP22.6
153
  Top 0.305: U$11.P$8 13.49,65.18 13.84,64.82 13.84,61.72 JP22.7
154
  Top 0.305: U$11.P$11 JP22.4
156
  Top 0.305: U$12.P$4 JP23.4
157
  Top 0.305: U$12.P$5 64.27,66.18 JP23.5
158
  Top 0.305: U$12.P$6 64.76,65.68 64.21,65.13 64.21,63.58 JP23.6
159
  Top 0.305: U$12.P$12 70.35,67.18 JP24.3
160
  Top 0.305: U$12.P$2 64.81,67.68 64.39,68.1 64.39,69.6 JP23.2
161
  Top 0.305: U$12.P$3 64.27,67.18 JP23.3
162
  Top 0.305: JP24.1 69.65,71.55 69.65,68.53 69.29,68.18 U$12.P$14 67.56,68.18 67.31,67.92 U$12.P$15
163
  Top 0.305: U$12.P$1 65.28,68.18 65.05,68.4 65.05,71.48 JP23.1
164
  Top 0.305: U$12.P$13 69.71,67.68 70.33,68.3 70.33,69.7 JP24.2
165
  Top 0.305: U$12.P$10 70.35,66.18 JP24.5
166
  Top 0.305: U$12.P$9 69.73,65.68 70.41,65 70.41,63.58 JP24.6
167
  Top 0.305: U$12.P$8 69.37,65.18 69.72,64.82 69.72,61.72 JP24.7
168
  Top 0.305: U$12.P$11 JP24.4
170
  Top 0.305: U$13.P$4 JP25.4
171
  Top 0.305: U$13.P$5 78.24,66.18 JP25.5
172
  Top 0.305: U$13.P$6 78.73,65.68 78.18,65.13 78.18,63.58 JP25.6
173
  Top 0.305: U$13.P$12 84.32,67.18 JP26.3
174
  Top 0.305: U$13.P$2 78.78,67.68 78.36,68.1 78.36,69.6 JP25.2
175
  Top 0.305: U$13.P$3 78.24,67.18 JP25.3
176
  Top 0.305: JP26.1 83.62,71.55 83.62,68.53 83.26,68.18 U$13.P$14 81.53,68.18 81.28,67.92 U$13.P$15
177
  Top 0.305: U$13.P$1 79.25,68.18 79.02,68.4 79.02,71.48 JP25.1
178
  Top 0.305: U$13.P$13 83.68,67.68 84.3,68.3 84.3,69.7 JP26.2
179
  Top 0.305: U$13.P$10 84.32,66.18 JP26.5
180
  Top 0.305: U$13.P$9 83.7,65.68 84.38,65 84.38,63.58 JP26.6
181
  Top 0.305: U$13.P$8 83.34,65.18 83.69,64.82 83.69,61.72 JP26.7
182
  Top 0.305: U$13.P$11 JP26.4
184
  Top 0.305: U$14.P$4 JP27.4
185
  Top 0.305: U$14.P$5 92.21,66.18 JP27.5
186
  Top 0.305: U$14.P$6 92.7,65.68 92.15,65.13 92.15,63.58 JP27.6
187
  Top 0.305: U$14.P$12 98.29,67.18 JP28.3
188
  Top 0.305: U$14.P$2 92.75,67.68 92.33,68.1 92.33,69.6 JP27.2
189
  Top 0.305: U$14.P$3 92.21,67.18 JP27.3
190
  Top 0.305: JP28.1 97.59,71.55 97.59,68.53 97.23,68.18 U$14.P$14 95.5,68.18 95.25,67.92 U$14.P$15
191
  Top 0.305: U$14.P$1 93.22,68.18 92.99,68.4 92.99,71.48 JP27.1
192
  Top 0.305: U$14.P$13 97.65,67.68 98.27,68.3 98.27,69.7 JP28.2
193
  Top 0.305: U$14.P$10 98.29,66.18 JP28.5
194
  Top 0.305: U$14.P$9 97.67,65.68 98.35,65 98.35,63.58 JP28.6
195
  Top 0.305: U$14.P$8 97.31,65.18 97.66,64.82 97.66,61.72 JP28.7
196
  Top 0.305: U$14.P$11 JP28.4
198
  Top 0.305: U$15.P$4 JP29.4
199
  Top 0.305: U$15.P$5 50.3,83.96 JP29.5
200
  Top 0.305: U$15.P$6 50.79,83.46 50.24,82.91 50.24,81.36 JP29.6
201
  Top 0.305: U$15.P$12 56.38,84.96 JP30.3
202
  Top 0.305: U$15.P$2 50.84,85.46 50.42,85.88 50.42,87.38 JP29.2
203
  Top 0.305: U$15.P$3 50.3,84.96 JP29.3
204
  Top 0.305: JP30.1 55.68,89.33 55.68,86.31 55.32,85.96 U$15.P$14 53.6,85.96 53.34,85.7 U$15.P$15
205
  Top 0.305: U$15.P$1 51.31,85.96 51.08,86.18 51.08,89.26 JP29.1
206
  Top 0.305: U$15.P$13 55.74,85.46 56.36,86.08 56.36,87.48 JP30.2
207
  Top 0.305: U$15.P$10 56.38,83.96 JP30.5
208
  Top 0.305: U$15.P$9 55.76,83.46 56.44,82.78 56.44,81.36 JP30.6
209
  Top 0.305: U$15.P$8 55.4,82.96 55.75,82.6 55.75,79.5 JP30.7
210
  Top 0.305: U$15.P$11 JP30.4
212
  Top 0.305: U$16.P$4 JP31.4
213
  Top 0.305: U$16.P$5 36.33,83.96 JP31.5
214
  Top 0.305: U$16.P$6 36.82,83.46 36.27,82.91 36.27,81.36 JP31.6
215
  Top 0.305: U$16.P$12 42.41,84.96 JP32.3
216
  Top 0.305: U$16.P$2 36.87,85.46 36.45,85.88 36.45,87.38 JP31.2
217
  Top 0.305: U$16.P$3 36.33,84.96 JP31.3
218
  Top 0.305: JP32.1 41.71,89.33 41.71,86.31 41.35,85.96 U$16.P$14 39.62,85.96 39.37,85.7 U$16.P$15
219
  Top 0.305: U$16.P$1 37.34,85.96 37.11,86.18 37.11,89.26 JP31.1
220
  Top 0.305: U$16.P$13 41.77,85.46 42.39,86.08 42.39,87.48 JP32.2
221
  Top 0.305: U$16.P$10 42.41,83.96 JP32.5
222
  Top 0.305: U$16.P$9 41.79,83.46 42.47,82.78 42.47,81.36 JP32.6
223
  Top 0.305: U$16.P$8 41.43,82.96 41.78,82.6 41.78,79.5 JP32.7
224
  Top 0.305: U$16.P$11 JP32.4
226
  Top 0.305: U$17.P$4 JP33.4
227
  Top 0.305: U$17.P$5 22.36,83.96 JP33.5
228
  Top 0.305: U$17.P$6 22.85,83.46 22.3,82.91 22.3,81.36 JP33.6
229
  Top 0.305: U$17.P$12 28.44,84.96 JP34.3
230
  Top 0.305: U$17.P$2 22.9,85.46 22.48,85.88 22.48,87.38 JP33.2
231
  Top 0.305: U$17.P$3 22.36,84.96 JP33.3
232
  Top 0.305: JP34.1 27.74,89.33 27.74,86.31 27.38,85.96 U$17.P$14 25.66,85.96 25.4,85.7 U$17.P$15
233
  Top 0.305: U$17.P$1 23.37,85.96 23.14,86.18 23.14,89.26 JP33.1
234
  Top 0.305: U$17.P$13 27.8,85.46 28.42,86.08 28.42,87.48 JP34.2
235
  Top 0.305: U$17.P$10 28.44,83.96 JP34.5
236
  Top 0.305: U$17.P$9 27.82,83.46 28.5,82.78 28.5,81.36 JP34.6
237
  Top 0.305: U$17.P$8 27.46,82.96 27.81,82.6 27.81,79.5 JP34.7
238
  Top 0.305: U$17.P$11 JP34.4
240
  Top 0.305: U$18.P$4 JP35.4
241
  Top 0.305: U$18.P$5 8.39,83.96 JP35.5
242
  Top 0.305: U$18.P$6 8.88,83.46 8.33,82.91 8.33,81.36 JP35.6
243
  Top 0.305: U$18.P$12 14.47,84.96 JP36.3
244
  Top 0.305: U$18.P$2 8.93,85.46 8.51,85.88 8.51,87.38 JP35.2
245
  Top 0.305: U$18.P$3 8.39,84.96 JP35.3
246
  Top 0.305: JP36.1 13.77,89.33 13.77,86.31 13.41,85.96 U$18.P$14 11.69,85.96 11.43,85.7 U$18.P$15
247
  Top 0.305: U$18.P$1 9.4,85.96 9.17,86.18 9.17,89.26 JP35.1
248
  Top 0.305: U$18.P$13 13.83,85.46 14.45,86.08 14.45,87.48 JP36.2
249
  Top 0.305: U$18.P$10 14.47,83.96 JP36.5
250
  Top 0.305: U$18.P$9 13.85,83.46 14.53,82.78 14.53,81.36 JP36.6
251
  Top 0.305: U$18.P$8 13.49,82.96 13.84,82.6 13.84,79.5 JP36.7
252
  Top 0.305: U$18.P$11 JP36.4
254
  Top 0.305: U$19.P$4 JP37.4
255
  Top 0.305: U$19.P$5 64.27,83.96 JP37.5
256
  Top 0.305: U$19.P$6 64.76,83.46 64.21,82.91 64.21,81.36 JP37.6
257
  Top 0.305: U$19.P$12 70.35,84.96 JP38.3
258
  Top 0.305: U$19.P$2 64.81,85.46 64.39,85.88 64.39,87.38 JP37.2
259
  Top 0.305: U$19.P$3 64.27,84.96 JP37.3
260
  Top 0.305: JP38.1 69.65,89.33 69.65,86.31 69.29,85.96 U$19.P$14 67.56,85.96 67.31,85.7 U$19.P$15
261
  Top 0.305: U$19.P$1 65.28,85.96 65.05,86.18 65.05,89.26 JP37.1
262
  Top 0.305: U$19.P$13 69.71,85.46 70.33,86.08 70.33,87.48 JP38.2
263
  Top 0.305: U$19.P$10 70.35,83.96 JP38.5
264
  Top 0.305: U$19.P$9 69.73,83.46 70.41,82.78 70.41,81.36 JP38.6
265
  Top 0.305: U$19.P$8 69.37,82.96 69.72,82.6 69.72,79.5 JP38.7
266
  Top 0.305: U$19.P$11 JP38.4
268
  Top 0.305: U$20.P$4 JP39.4
269
  Top 0.305: U$20.P$5 78.24,83.96 JP39.5
270
  Top 0.305: U$20.P$6 78.73,83.46 78.18,82.91 78.18,81.36 JP39.6
271
  Top 0.305: U$20.P$12 84.32,84.96 JP40.3
272
  Top 0.305: U$20.P$2 78.78,85.46 78.36,85.88 78.36,87.38 JP39.2
273
  Top 0.305: U$20.P$3 78.24,84.96 JP39.3
274
  Top 0.305: JP40.1 83.62,89.33 83.62,86.31 83.26,85.96 U$20.P$14 81.53,85.96 81.28,85.7 U$20.P$15
275
  Top 0.305: U$20.P$1 79.25,85.96 79.02,86.18 79.02,89.26 JP39.1
276
  Top 0.305: U$20.P$13 83.68,85.46 84.3,86.08 84.3,87.48 JP40.2
277
  Top 0.305: U$20.P$10 84.32,83.96 JP40.5
278
  Top 0.305: U$20.P$9 83.7,83.46 84.38,82.78 84.38,81.36 JP40.6
279
  Top 0.305: U$20.P$8 83.34,82.96 83.69,82.6 83.69,79.5 JP40.7
280
  Top 0.305: U$20.P$11 JP40.4
282
  Top 0.305: U$21.P$4 JP41.4
283
  Top 0.305: U$21.P$5 92.21,83.96 JP41.5
284
  Top 0.305: U$21.P$6 92.7,83.46 92.15,82.91 92.15,81.36 JP41.6
285
  Top 0.305: U$21.P$12 98.29,84.96 JP42.3
286
  Top 0.305: U$21.P$2 92.75,85.46 92.33,85.88 92.33,87.38 JP41.2
287
  Top 0.305: U$21.P$3 92.21,84.96 JP41.3
288
  Top 0.305: JP42.1 97.59,89.33 97.59,86.31 97.23,85.96 U$21.P$14 95.5,85.96 95.25,85.7 U$21.P$15
289
  Top 0.305: U$21.P$1 93.22,85.96 92.99,86.18 92.99,89.26 JP41.1
290
  Top 0.305: U$21.P$13 97.65,85.46 98.27,86.08 98.27,87.48 JP42.2
291
  Top 0.305: U$21.P$10 98.29,83.96 JP42.5
292
  Top 0.305: U$21.P$9 97.67,83.46 98.35,82.78 98.35,81.36 JP42.6
293
  Top 0.305: U$21.P$8 97.31,82.96 97.66,82.6 97.66,79.5 JP42.7
294
  Top 0.305: U$21.P$11 JP42.4
296
  Top 0.305: U$22.P$4 JP43.4
297
  Top 0.305: U$22.P$5 50.3,30.62 JP43.5
298
  Top 0.305: U$22.P$6 50.79,30.12 50.24,29.57 50.24,28.02 JP43.6
299
  Top 0.305: U$22.P$12 56.38,31.62 JP44.3
300
  Top 0.305: U$22.P$2 50.84,32.12 50.42,32.54 50.42,34.04 JP43.2
301
  Top 0.305: U$22.P$3 50.3,31.62 JP43.3
302
  Top 0.305: JP44.1 55.68,35.99 55.68,32.97 55.32,32.62 U$22.P$14 53.6,32.62 53.34,32.36 U$22.P$15
303
  Top 0.305: U$22.P$1 51.31,32.62 51.08,32.84 51.08,35.92 JP43.1
304
  Top 0.305: U$22.P$13 55.74,32.12 56.36,32.74 56.36,34.14 JP44.2
305
  Top 0.305: U$22.P$10 56.38,30.62 JP44.5
306
  Top 0.305: U$22.P$9 55.76,30.12 56.44,29.44 56.44,28.02 JP44.6
307
  Top 0.305: U$22.P$8 55.4,29.62 55.75,29.26 55.75,26.16 JP44.7
308
  Top 0.305: U$22.P$11 JP44.4
310
  Top 0.305: U$23.P$4 JP45.4
311
  Top 0.305: U$23.P$5 36.33,30.62 JP45.5
312
  Top 0.305: U$23.P$6 36.82,30.12 36.27,29.57 36.27,28.02 JP45.6
313
  Top 0.305: U$23.P$12 42.41,31.62 JP46.3
314
  Top 0.305: U$23.P$2 36.87,32.12 36.45,32.54 36.45,34.04 JP45.2
315
  Top 0.305: U$23.P$3 36.33,31.62 JP45.3
316
  Top 0.305: JP46.1 41.71,35.99 41.71,32.97 41.35,32.62 U$23.P$14 39.62,32.62 39.37,32.36 U$23.P$15
317
  Top 0.305: U$23.P$1 37.34,32.62 37.11,32.84 37.11,35.92 JP45.1
318
  Top 0.305: U$23.P$13 41.77,32.12 42.39,32.74 42.39,34.14 JP46.2
319
  Top 0.305: U$23.P$10 42.41,30.62 JP46.5
320
  Top 0.305: U$23.P$9 41.79,30.12 42.47,29.44 42.47,28.02 JP46.6
321
  Top 0.305: U$23.P$8 41.43,29.62 41.78,29.26 41.78,26.16 JP46.7
322
  Top 0.305: U$23.P$11 JP46.4
324
  Top 0.305: U$24.P$4 JP47.4
325
  Top 0.305: U$24.P$5 22.36,30.62 JP47.5
326
  Top 0.305: U$24.P$6 22.85,30.12 22.3,29.57 22.3,28.02 JP47.6
327
  Top 0.305: U$24.P$12 28.44,31.62 JP48.3
328
  Top 0.305: U$24.P$2 22.9,32.12 22.48,32.54 22.48,34.04 JP47.2
329
  Top 0.305: U$24.P$3 22.36,31.62 JP47.3
330
  Top 0.305: JP48.1 27.74,35.99 27.74,32.97 27.38,32.62 U$24.P$14 25.66,32.62 25.4,32.36 U$24.P$15
331
  Top 0.305: U$24.P$1 23.37,32.62 23.14,32.84 23.14,35.92 JP47.1
332
  Top 0.305: U$24.P$13 27.8,32.12 28.42,32.74 28.42,34.14 JP48.2
333
  Top 0.305: U$24.P$10 28.44,30.62 JP48.5
334
  Top 0.305: U$24.P$9 27.82,30.12 28.5,29.44 28.5,28.02 JP48.6
335
  Top 0.305: U$24.P$8 27.46,29.62 27.81,29.26 27.81,26.16 JP48.7
336
  Top 0.305: U$24.P$11 JP48.4
338
  Top 0.305: U$25.P$4 JP49.4
339
  Top 0.305: U$25.P$5 8.39,30.62 JP49.5
340
  Top 0.305: U$25.P$6 8.88,30.12 8.33,29.57 8.33,28.02 JP49.6
341
  Top 0.305: U$25.P$12 14.47,31.62 JP50.3
342
  Top 0.305: U$25.P$2 8.93,32.12 8.51,32.54 8.51,34.04 JP49.2
343
  Top 0.305: U$25.P$3 8.39,31.62 JP49.3
344
  Top 0.305: JP50.1 13.77,35.99 13.77,32.97 13.41,32.62 U$25.P$14 11.69,32.62 11.43,32.36 U$25.P$15
345
  Top 0.305: U$25.P$1 9.4,32.62 9.17,32.84 9.17,35.92 JP49.1
346
  Top 0.305: U$25.P$13 13.83,32.12 14.45,32.74 14.45,34.14 JP50.2
347
  Top 0.305: U$25.P$10 14.47,30.62 JP50.5
348
  Top 0.305: U$25.P$9 13.85,30.12 14.53,29.44 14.53,28.02 JP50.6
349
  Top 0.305: U$25.P$8 13.49,29.62 13.84,29.26 13.84,26.16 JP50.7
350
  Top 0.305: U$25.P$11 JP50.4
352
  Top 0.305: U$26.P$4 JP51.4
353
  Top 0.305: U$26.P$5 64.27,30.62 JP51.5
354
  Top 0.305: U$26.P$6 64.76,30.12 64.21,29.57 64.21,28.02 JP51.6
355
  Top 0.305: U$26.P$12 70.35,31.62 JP52.3
356
  Top 0.305: U$26.P$2 64.81,32.12 64.39,32.54 64.39,34.04 JP51.2
357
  Top 0.305: U$26.P$3 64.27,31.62 JP51.3
358
  Top 0.305: JP52.1 69.65,35.99 69.65,32.97 69.29,32.62 U$26.P$14 67.56,32.62 67.31,32.36 U$26.P$15
359
  Top 0.305: U$26.P$1 65.28,32.62 65.05,32.84 65.05,35.92 JP51.1
360
  Top 0.305: U$26.P$13 69.71,32.12 70.33,32.74 70.33,34.14 JP52.2
361
  Top 0.305: U$26.P$10 70.35,30.62 JP52.5
362
  Top 0.305: U$26.P$9 69.73,30.12 70.41,29.44 70.41,28.02 JP52.6
363
  Top 0.305: U$26.P$8 69.37,29.62 69.72,29.26 69.72,26.16 JP52.7
364
  Top 0.305: U$26.P$11 JP52.4
366
  Top 0.305: U$27.P$4 JP53.4
367
  Top 0.305: U$27.P$5 78.24,30.62 JP53.5
368
  Top 0.305: U$27.P$6 78.73,30.12 78.18,29.57 78.18,28.02 JP53.6
369
  Top 0.305: U$27.P$12 84.32,31.62 JP54.3
370
  Top 0.305: U$27.P$2 78.78,32.12 78.36,32.54 78.36,34.04 JP53.2
371
  Top 0.305: U$27.P$3 78.24,31.62 JP53.3
372
  Top 0.305: JP54.1 83.62,35.99 83.62,32.97 83.26,32.62 U$27.P$14 81.53,32.62 81.28,32.36 U$27.P$15
373
  Top 0.305: U$27.P$1 79.25,32.62 79.02,32.84 79.02,35.92 JP53.1
374
  Top 0.305: U$27.P$13 83.68,32.12 84.3,32.74 84.3,34.14 JP54.2
375
  Top 0.305: U$27.P$10 84.32,30.62 JP54.5
376
  Top 0.305: U$27.P$9 83.7,30.12 84.38,29.44 84.38,28.02 JP54.6
377
  Top 0.305: U$27.P$8 83.34,29.62 83.69,29.26 83.69,26.16 JP54.7
378
  Top 0.305: U$27.P$11 JP54.4
380
  Top 0.305: U$28.P$4 JP55.4
381
  Top 0.305: U$28.P$5 92.21,30.62 JP55.5
382
  Top 0.305: U$28.P$6 92.7,30.12 92.15,29.57 92.15,28.02 JP55.6
383
  Top 0.305: U$28.P$12 98.29,31.62 JP56.3
384
  Top 0.305: U$28.P$2 92.75,32.12 92.33,32.54 92.33,34.04 JP55.2
385
  Top 0.305: U$28.P$3 92.21,31.62 JP55.3
386
  Top 0.305: JP56.1 97.59,35.99 97.59,32.97 97.23,32.62 U$28.P$14 95.5,32.62 95.25,32.36 U$28.P$15
387
  Top 0.305: U$28.P$1 93.22,32.62 92.99,32.84 92.99,35.92 JP55.1
388
  Top 0.305: U$28.P$13 97.65,32.12 98.27,32.74 98.27,34.14 JP56.2
389
  Top 0.305: U$28.P$10 98.29,30.62 JP56.5
390
  Top 0.305: U$28.P$9 97.67,30.12 98.35,29.44 98.35,28.02 JP56.6
391
  Top 0.305: U$28.P$8 97.31,29.62 97.66,29.26 97.66,26.16 JP56.7
392
  Top 0.305: U$28.P$11 JP56.4
394
  Top 0.305: U$29.P$4 JP57.4
395
  Top 0.305: U$29.P$5 50.3,12.84 JP57.5
396
  Top 0.305: U$29.P$6 50.79,12.34 50.24,11.79 50.24,10.24 JP57.6
397
  Top 0.305: U$29.P$12 56.38,13.84 JP58.3
398
  Top 0.305: U$29.P$2 50.84,14.34 50.42,14.76 50.42,16.26 JP57.2
399
  Top 0.305: U$29.P$3 50.3,13.84 JP57.3
400
  Top 0.305: JP58.1 55.68,18.21 55.68,15.19 55.32,14.84 U$29.P$14 53.6,14.84 53.34,14.58 U$29.P$15
401
  Top 0.305: U$29.P$1 51.31,14.84 51.08,15.06 51.08,18.14 JP57.1
402
  Top 0.305: U$29.P$13 55.74,14.34 56.36,14.96 56.36,16.36 JP58.2
403
  Top 0.305: U$29.P$10 56.38,12.84 JP58.5
404
  Top 0.305: U$29.P$9 55.76,12.34 56.44,11.66 56.44,10.24 JP58.6
405
  Top 0.305: U$29.P$8 55.4,11.84 55.75,11.48 55.75,8.38 JP58.7
406
  Top 0.305: U$29.P$11 JP58.4
408
  Top 0.305: U$30.P$4 JP59.4
409
  Top 0.305: U$30.P$5 36.33,12.84 JP59.5
410
  Top 0.305: U$30.P$6 36.82,12.34 36.27,11.79 36.27,10.24 JP59.6
411
  Top 0.305: U$30.P$12 42.41,13.84 JP60.3
412
  Top 0.305: U$30.P$2 36.87,14.34 36.45,14.76 36.45,16.26 JP59.2
413
  Top 0.305: U$30.P$3 36.33,13.84 JP59.3
414
  Top 0.305: JP60.1 41.71,18.21 41.71,15.19 41.35,14.84 U$30.P$14 39.62,14.84 39.37,14.58 U$30.P$15
415
  Top 0.305: U$30.P$1 37.34,14.84 37.11,15.06 37.11,18.14 JP59.1
416
  Top 0.305: U$30.P$13 41.77,14.34 42.39,14.96 42.39,16.36 JP60.2
417
  Top 0.305: U$30.P$10 42.41,12.84 JP60.5
418
  Top 0.305: U$30.P$9 41.79,12.34 42.47,11.66 42.47,10.24 JP60.6
419
  Top 0.305: U$30.P$8 41.43,11.84 41.78,11.48 41.78,8.38 JP60.7
420
  Top 0.305: U$30.P$11 JP60.4
422
  Top 0.305: U$31.P$4 JP61.4
423
  Top 0.305: U$31.P$5 22.36,12.84 JP61.5
424
  Top 0.305: U$31.P$6 22.85,12.34 22.3,11.79 22.3,10.24 JP61.6
425
  Top 0.305: U$31.P$12 28.44,13.84 JP62.3
426
  Top 0.305: U$31.P$2 22.9,14.34 22.48,14.76 22.48,16.26 JP61.2
427
  Top 0.305: U$31.P$3 22.36,13.84 JP61.3
428
  Top 0.305: JP62.1 27.74,18.21 27.74,15.19 27.38,14.84 U$31.P$14 25.66,14.84 25.4,14.58 U$31.P$15
429
  Top 0.305: U$31.P$1 23.37,14.84 23.14,15.06 23.14,18.14 JP61.1
430
  Top 0.305: U$31.P$13 27.8,14.34 28.42,14.96 28.42,16.36 JP62.2
431
  Top 0.305: U$31.P$10 28.44,12.84 JP62.5
432
  Top 0.305: U$31.P$9 27.82,12.34 28.5,11.66 28.5,10.24 JP62.6
433
  Top 0.305: U$31.P$8 27.46,11.84 27.81,11.48 27.81,8.38 JP62.7
434
  Top 0.305: U$31.P$11 JP62.4
436
  Top 0.305: U$32.P$4 JP63.4
437
  Top 0.305: U$32.P$5 8.39,12.84 JP63.5
438
  Top 0.305: U$32.P$6 8.88,12.34 8.33,11.79 8.33,10.24 JP63.6
439
  Top 0.305: U$32.P$12 14.47,13.84 JP64.3
440
  Top 0.305: U$32.P$2 8.93,14.34 8.51,14.76 8.51,16.26 JP63.2
441
  Top 0.305: U$32.P$3 8.39,13.84 JP63.3
442
  Top 0.305: JP64.1 13.77,18.21 13.77,15.19 13.41,14.84 U$32.P$14 11.69,14.84 11.43,14.58 U$32.P$15
443
  Top 0.305: U$32.P$1 9.4,14.84 9.17,15.06 9.17,18.14 JP63.1
444
  Top 0.305: U$32.P$13 13.83,14.34 14.45,14.96 14.45,16.36 JP64.2
445
  Top 0.305: U$32.P$10 14.47,12.84 JP64.5
446
  Top 0.305: U$32.P$9 13.85,12.34 14.53,11.66 14.53,10.24 JP64.6
447
  Top 0.305: U$32.P$8 13.49,11.84 13.84,11.48 13.84,8.38 JP64.7
448
  Top 0.305: U$32.P$11 JP64.4
450
  Top 0.305: U$33.P$4 JP65.4
451
  Top 0.305: U$33.P$5 64.27,12.84 JP65.5
452
  Top 0.305: U$33.P$6 64.76,12.34 64.21,11.79 64.21,10.24 JP65.6
453
  Top 0.305: U$33.P$12 70.35,13.84 JP66.3
454
  Top 0.305: U$33.P$2 64.81,14.34 64.39,14.76 64.39,16.26 JP65.2
455
  Top 0.305: U$33.P$3 64.27,13.84 JP65.3
456
  Top 0.305: JP66.1 69.65,18.21 69.65,15.19 69.29,14.84 U$33.P$14 67.56,14.84 67.31,14.58 U$33.P$15
457
  Top 0.305: U$33.P$1 65.28,14.84 65.05,15.06 65.05,18.14 JP65.1
458
  Top 0.305: U$33.P$13 69.71,14.34 70.33,14.96 70.33,16.36 JP66.2
459
  Top 0.305: U$33.P$10 70.35,12.84 JP66.5
460
  Top 0.305: U$33.P$9 69.73,12.34 70.41,11.66 70.41,10.24 JP66.6
461
  Top 0.305: U$33.P$8 69.37,11.84 69.72,11.48 69.72,8.38 JP66.7
462
  Top 0.305: U$33.P$11 JP66.4
464
  Top 0.305: U$34.P$4 JP67.4
465
  Top 0.305: U$34.P$5 78.24,12.84 JP67.5
466
  Top 0.305: U$34.P$6 78.73,12.34 78.18,11.79 78.18,10.24 JP67.6
467
  Top 0.305: U$34.P$12 84.32,13.84 JP68.3
468
  Top 0.305: U$34.P$2 78.78,14.34 78.36,14.76 78.36,16.26 JP67.2
469
  Top 0.305: U$34.P$3 78.24,13.84 JP67.3
470
  Top 0.305: JP68.1 83.62,18.21 83.62,15.19 83.26,14.84 U$34.P$14 81.53,14.84 81.28,14.58 U$34.P$15
471
  Top 0.305: U$34.P$1 79.25,14.84 79.02,15.06 79.02,18.14 JP67.1
472
  Top 0.305: U$34.P$13 83.68,14.34 84.3,14.96 84.3,16.36 JP68.2
473
  Top 0.305: U$34.P$10 84.32,12.84 JP68.5
474
  Top 0.305: U$34.P$9 83.7,12.34 84.38,11.66 84.38,10.24 JP68.6
475
  Top 0.305: U$34.P$8 83.34,11.84 83.69,11.48 83.69,8.38 JP68.7
476
  Top 0.305: U$34.P$11 JP68.4
478
  Top 0.305: U$35.P$4 JP69.4
479
  Top 0.305: U$35.P$5 92.21,12.84 JP69.5
480
  Top 0.305: U$35.P$6 92.7,12.34 92.15,11.79 92.15,10.24 JP69.6
481
  Top 0.305: U$35.P$12 98.29,13.84 JP70.3
482
  Top 0.305: U$35.P$2 92.75,14.34 92.33,14.76 92.33,16.26 JP69.2
483
  Top 0.305: U$35.P$3 92.21,13.84 JP69.3
484
  Top 0.305: JP70.1 97.59,18.21 97.59,15.19 97.23,14.84 U$35.P$14 95.5,14.84 95.25,14.58 U$35.P$15
485
  Top 0.305: U$35.P$1 93.22,14.84 92.99,15.06 92.99,18.14 JP69.1
486
  Top 0.305: U$35.P$13 97.65,14.34 98.27,14.96 98.27,16.36 JP70.2
487
  Top 0.305: U$35.P$10 98.29,12.84 JP70.5
488
  Top 0.305: U$35.P$9 97.67,12.34 98.35,11.66 98.35,10.24 JP70.6
489
  Top 0.305: U$35.P$8 97.31,11.84 97.66,11.48 97.66,8.38 JP70.7
490
  Top 0.305: U$35.P$11 JP70.4

## Text on the board
Dimension: V-cut | V-cut | V-cut | V-cut | V-cut | V-cut | V-cut | V-cut | V-cut | V-cut
tPlace: RT7258QW | RT7258QW | RT7258QW | RT7258QW | RT7258QW | RT7258QW | RT7258QW | RT7258QW | RT7258QW | RT7258QW | RT7258QW | RT7258QW | RT7258QW | RT7258QW | RT7258QW | RT7258QW | RT7258QW | RT7258QW | RT7258QW | RT7258QW | RT7258QW | RT7258QW | RT7258QW | RT7258QW | RT7258QW | RT7258QW | RT7258QW | RT7258QW | RT7258QW | RT7258QW | RT7258QW | RT7258QW | RT7258QW | RT7258QW | RT7258QW
tDocu: 97.79 x 88.9 mm